# Altium PCB 8500_ADC_pcb.PcbDoc
Units mil, origin at the board's own origin, x right, y up, seen from the top; angles counter-clockwise.
Board outline 2040 x 2040 mil, 4 copper layers (Top Layer, Conexiones, Tierra, Bottom Layer); 92 components, 110 nets, 471 pads, 145 vias.
Unrouted connection lines stored in the file: 1.
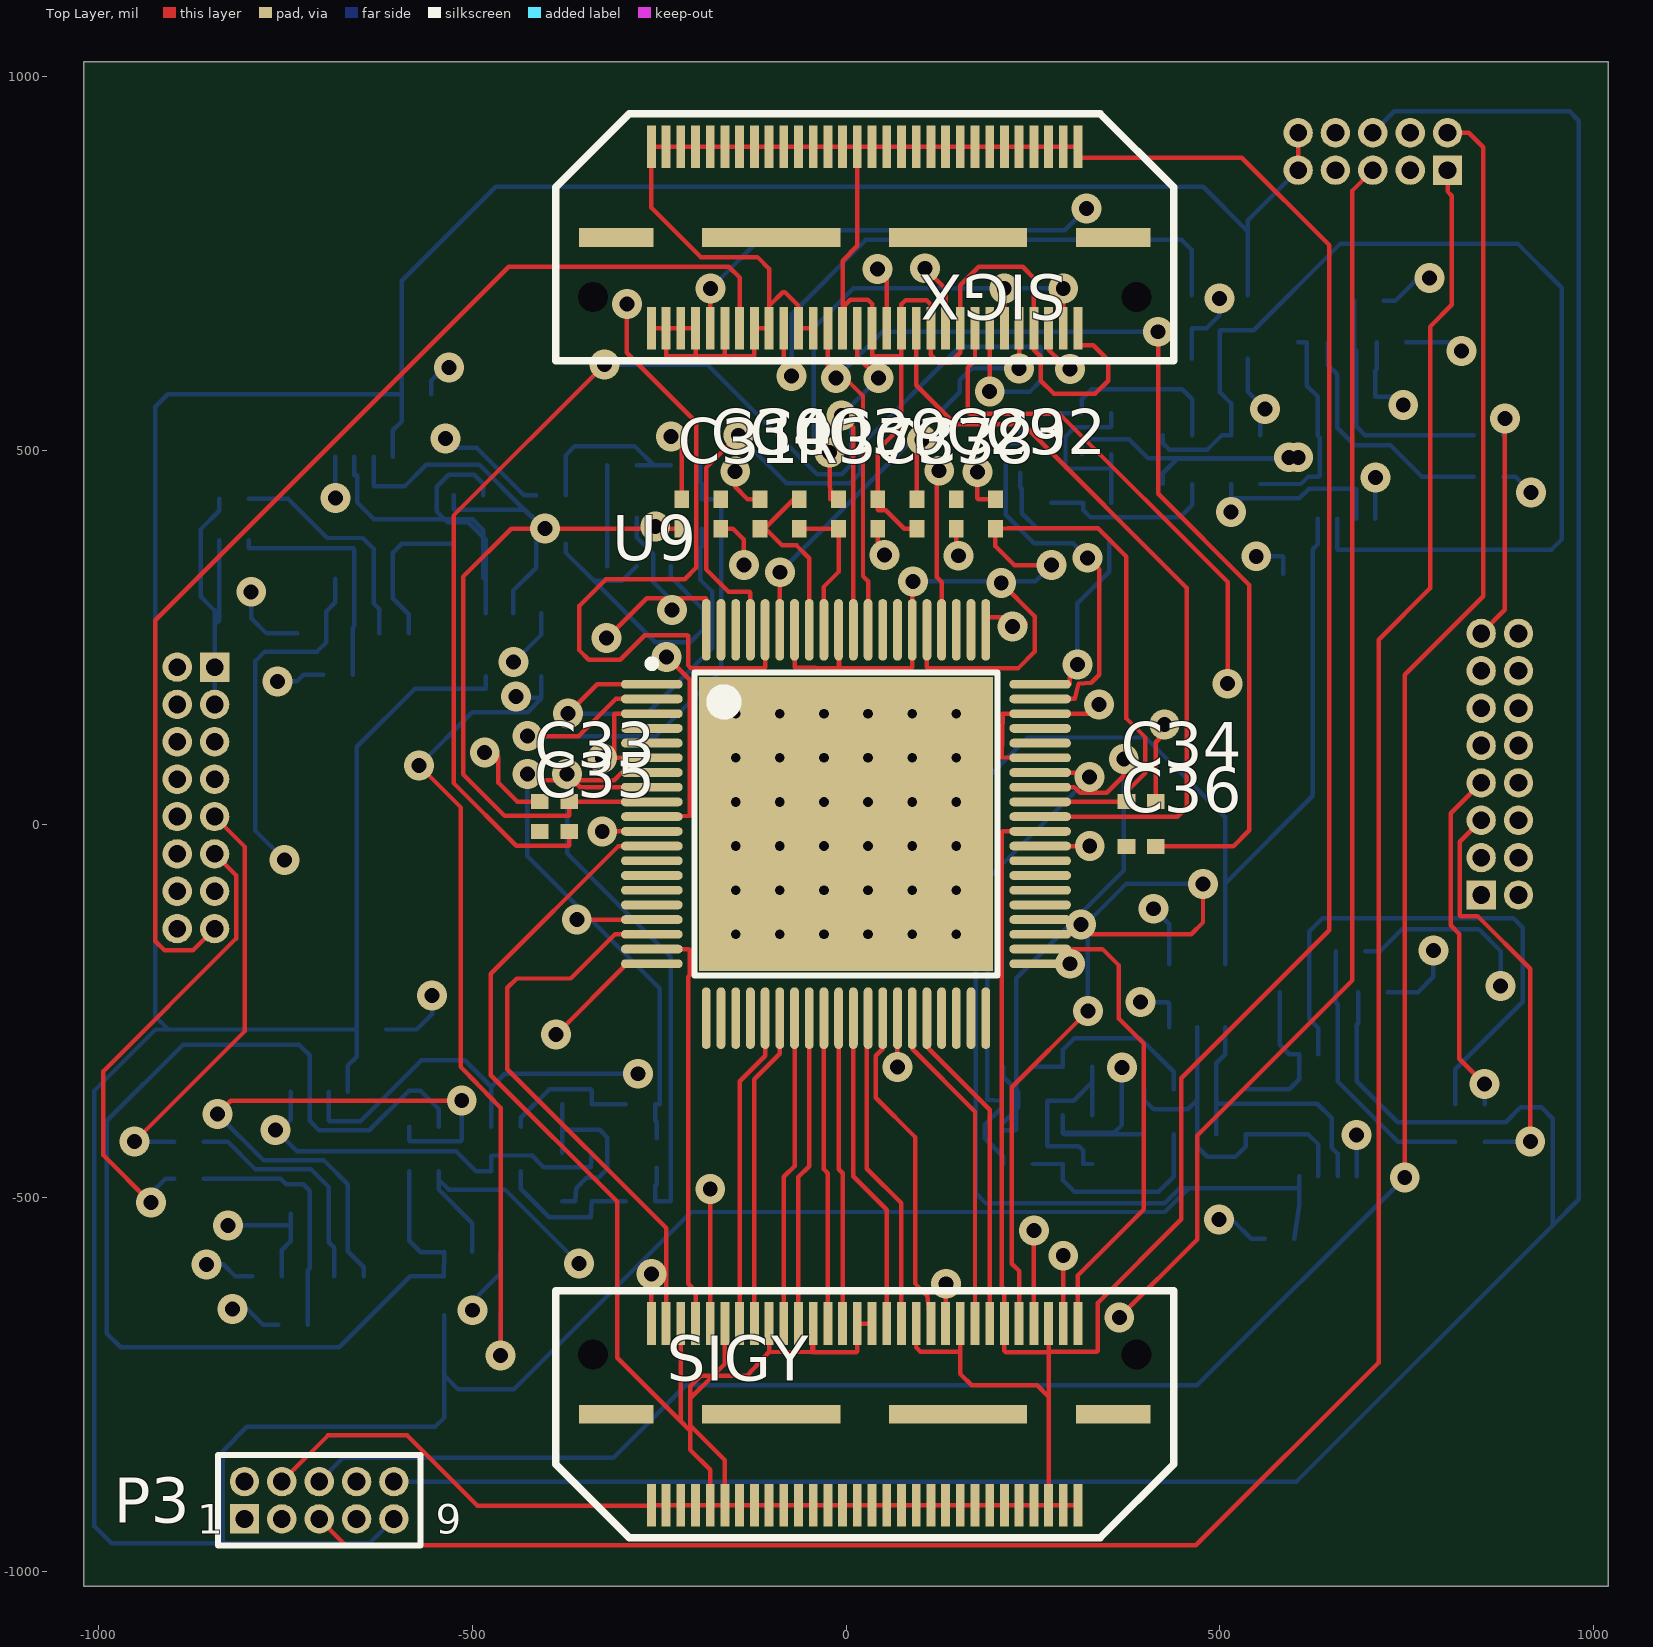
[diagram p0: Top Layer view]
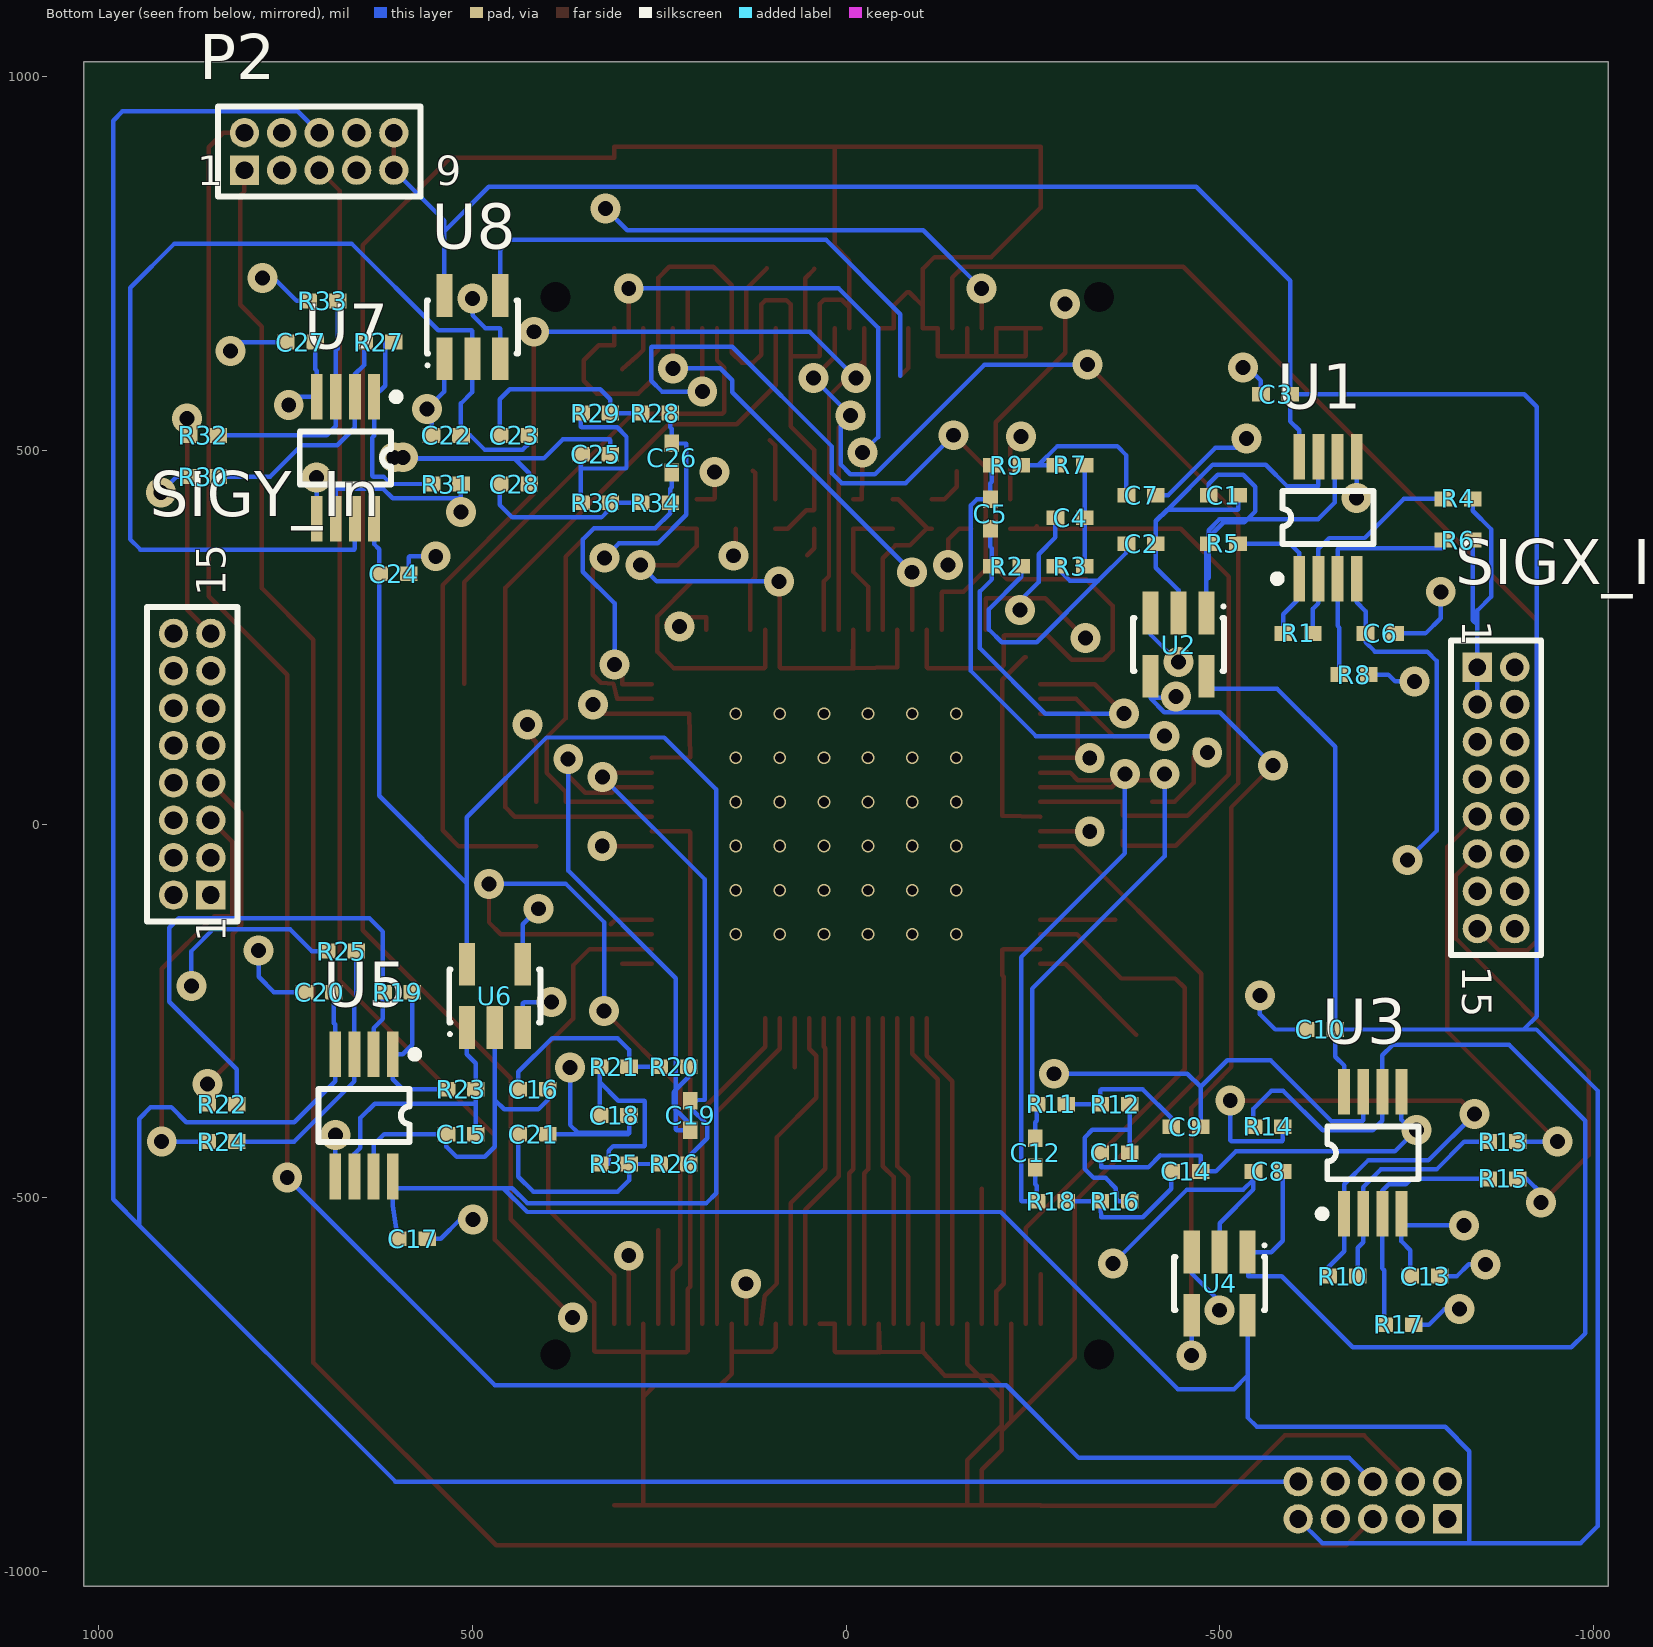
[diagram p1: Bottom Layer view, seen from below]
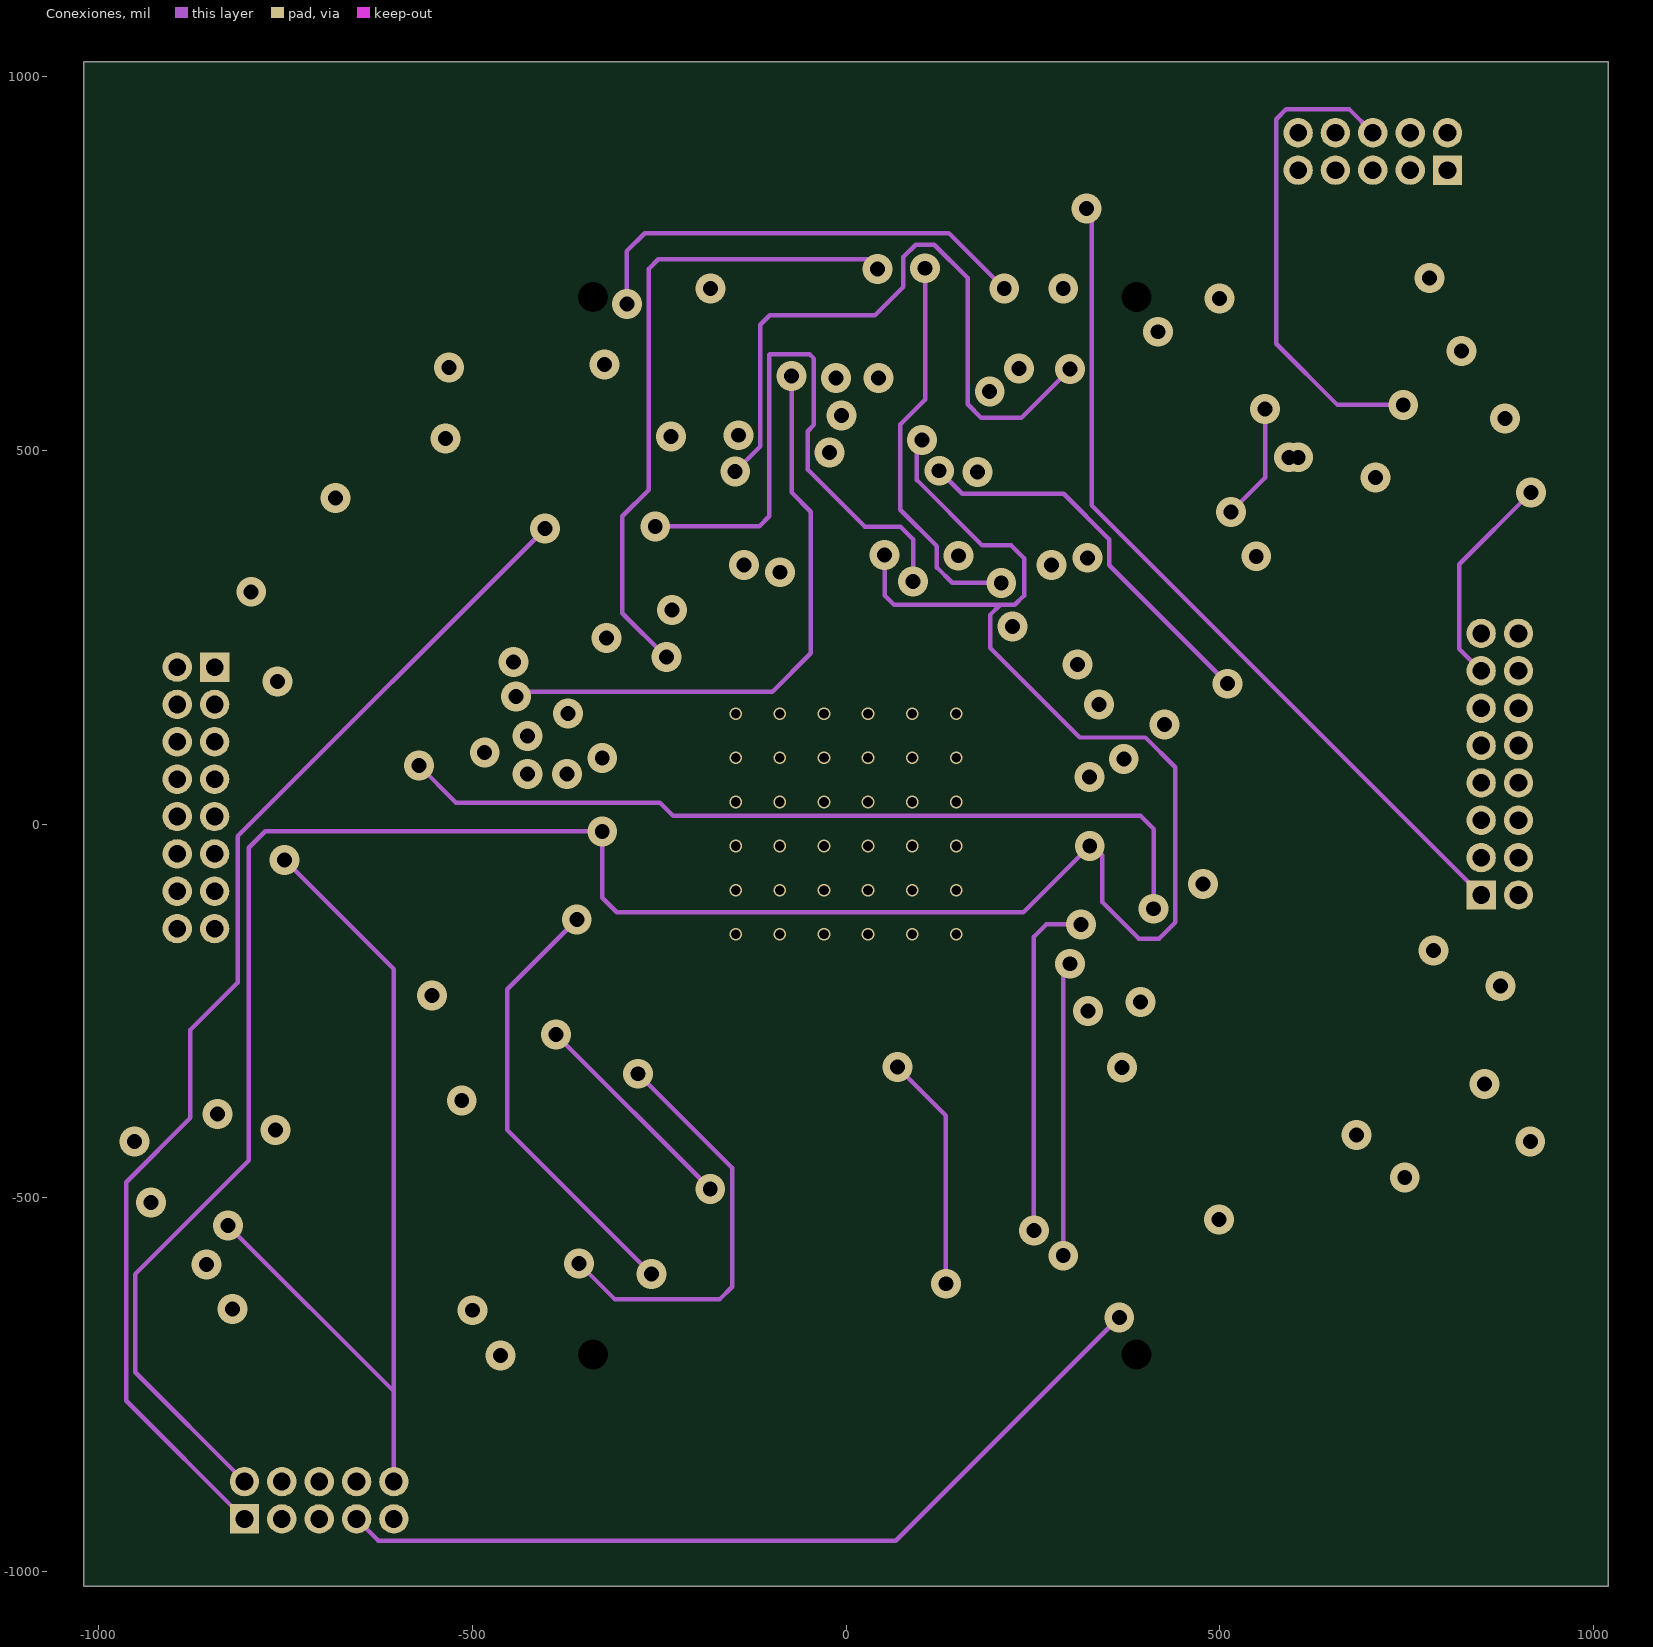
[diagram p2: Conexiones]
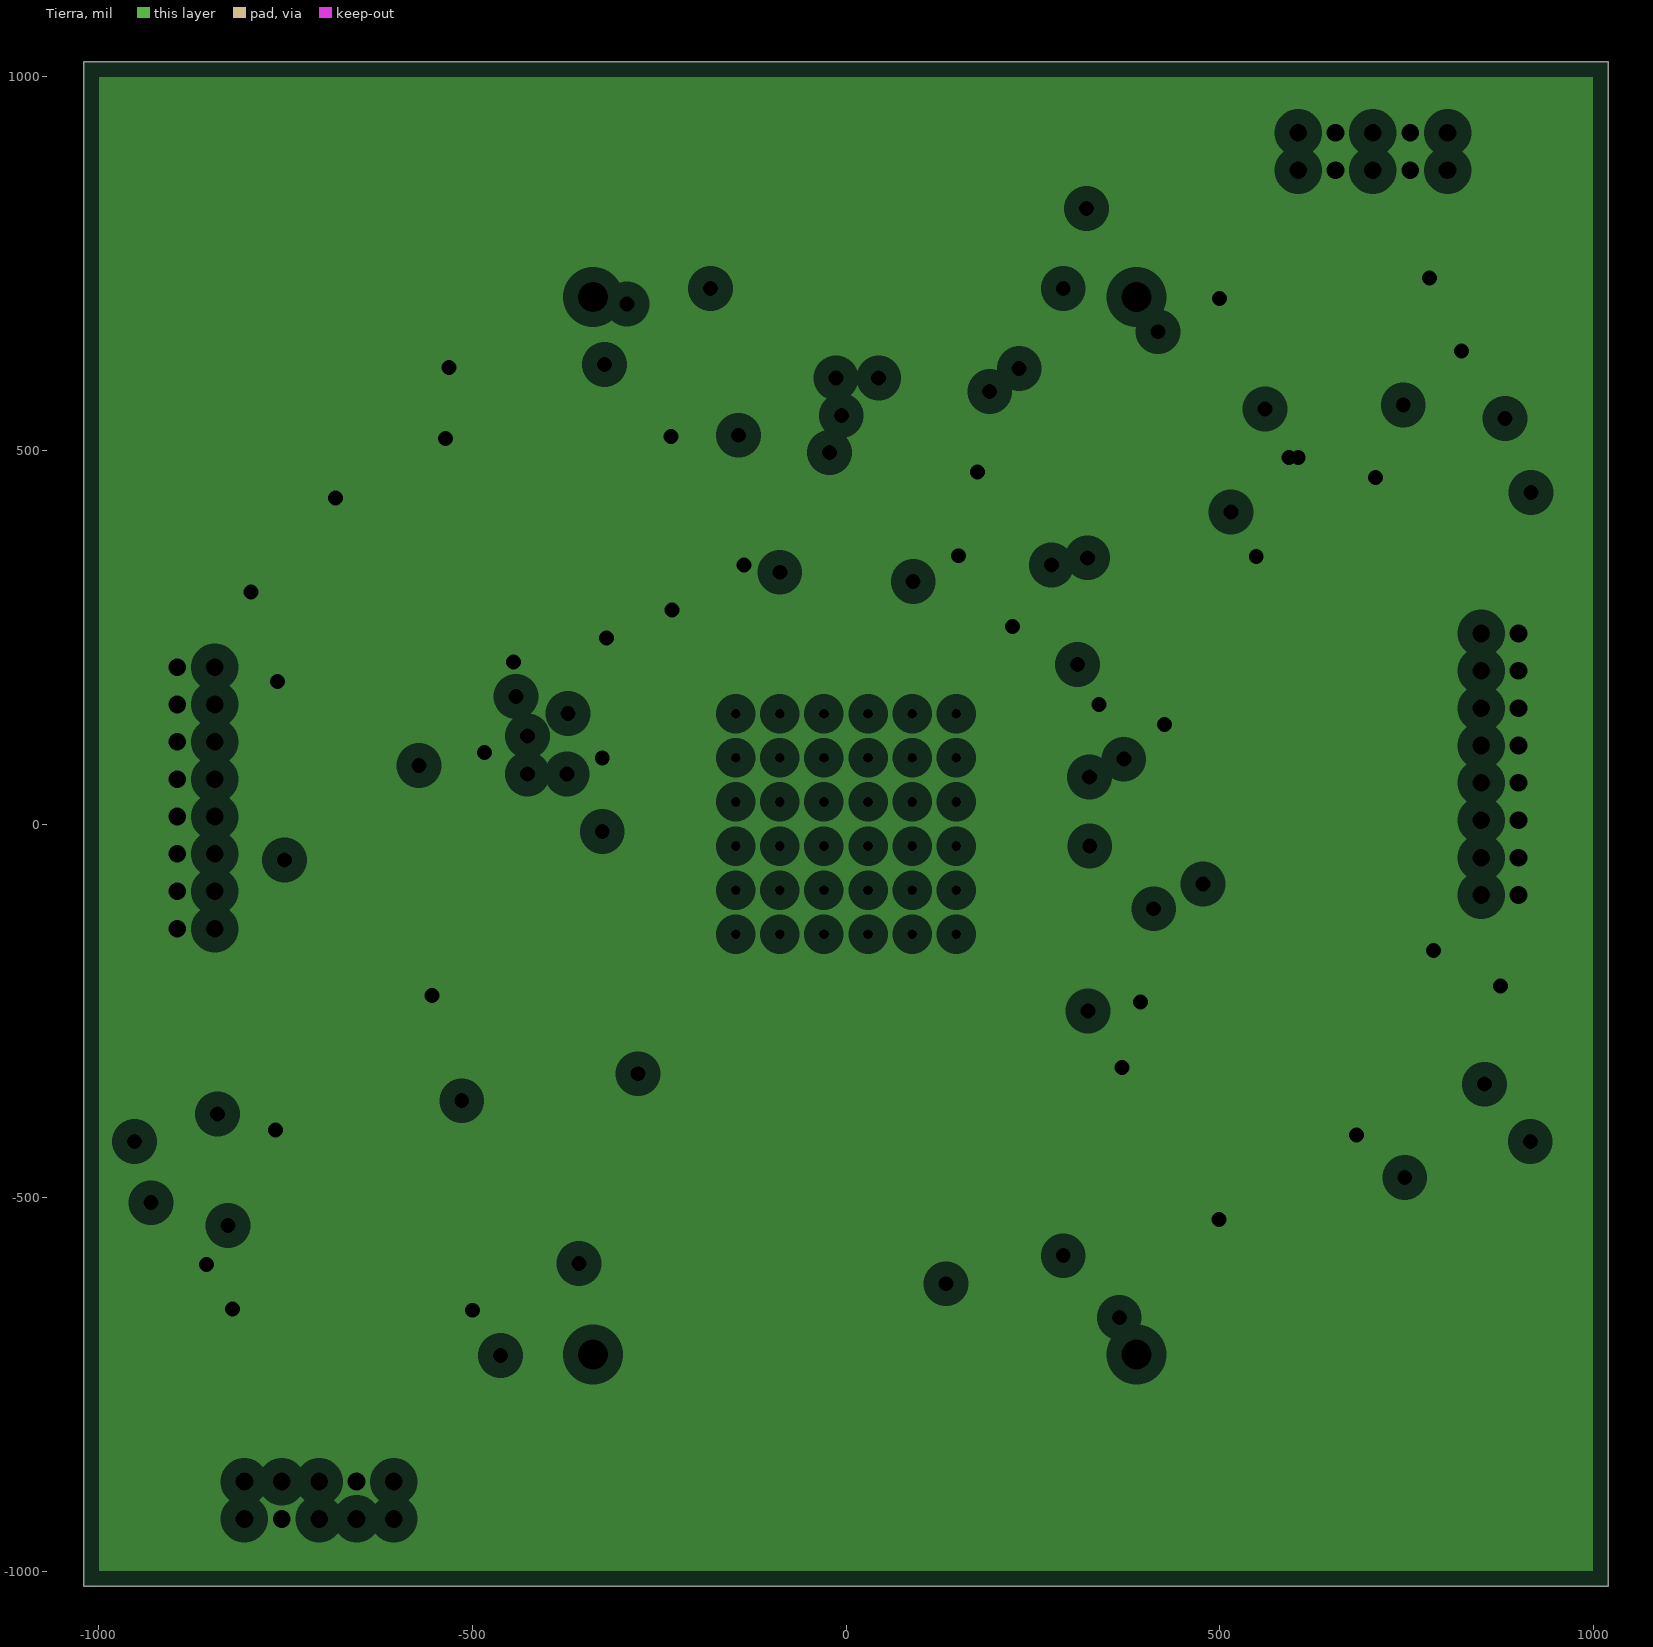
[diagram p3: Tierra, clearances drawn from the general rule]

## Layer stack, top to bottom
Top Layer: signal copper 1.4
Dielectric: core 12.6, FR-4, Dk 4.8
Conexiones: signal copper 1.4
Dielectric: prepreg 12.6, FR-4, Dk 4.8
Tierra: plane copper 1.4, net GND
Dielectric: core 12.6, FR-4, Dk 4.8
Bottom Layer: signal copper 1.4

## Board outline
-1020,-1020 1020,-1020 1020,1020 -1020,1020

## Design rules (kind name [scope] priority, off if disabled: settings)
Clearance [All] p1: gap=6
DiffPairsRouting [All] p1: maxlimit=6 minlimit=6 mostfreqgap=6 maxuncoupledlength=50
PlaneClearance [All] p1: clearance=20
PlaneConnect [All] p1: planeconnectstyle=Relief reliefexpansion=20 reliefentries=4 reliefconductorwidth=10 reliefairgap=10
PolygonConnect [All] p1: connectstyle=Relief reliefconductorwidth=10 reliefentries=4 polygonreliefangle="90 Angle"
RoutingVias [All] p1: holewidth=20 width=40 viastyle="Through Hole" minholewidth=20 minwidth=40 maxholewidth=20 maxwidth=40
SilkscreenOverComponentPads [All] p1: minsilkscreentomaskgap=10
SolderMaskExpansion SolderMaskExpansion_1 [IsVia] p1: expansion=1
SolderMaskExpansion [All] p2: expansion=3
Width [All] p1: maxlimit=10 minlimit=6 preferedwidth=6
24 further rules are at their usual default settings.

## Classes and differential pairs
component class 8500_ADC_X: C1 C2 C3 C4 C5 C6 C7 C8 C9 C10 C11 C12 C13 C14 P1 P3 R1 R2 R3 R4 R5 R6 R7 R8 R9 R10 R11 R12 R13 R14 R15 R16 R17 R18 SIGX_In SIGX_In1 U1 U2 U3 U4
component class 8500_ADC: C29 C30 C31 C32 C33 C34 C35 C36 C37 C38 C39 C40 R37 SIGX SIGX1 SIGY SIGY1 U9
component class 8500_ADC_Y: C15 C16 C17 C18 C19 C20 C21 C22 C23 C24 C25 C26 C27 C28 P2 R19 R20 R21 R22 R23 R24 R25 R26 R27 R28 R29 R30 R31 R32 R33 R34 R35 R36 SIGY_In SIGY_In1 U5 U6 U7 U8
differential pair CH2: +CH2_P -CH2_N
differential pair CH4: +CH4_P -CH4_N
differential pair CH5: +CH5_P -CH5_N
differential pair CH7: +CH7_P -CH7_N
differential pair XA: +XA_P -XA_N
differential pair XB: +XB_P -XB_N
differential pair YA: +YA_P -YA_N
differential pair YB: +YB_P -YB_N
differential pair ACLK: +ACLK_P -ACLK_N
differential pair CH2A: +CH2A_P -CH2A_N
differential pair CH2B: +CH2B_P -CH2B_N
differential pair CH4A: +CH4A_P -CH4A_N
differential pair CH4B: +CH4B_P -CH4B_N
differential pair CH5A: +CH5A_P -CH5A_N
differential pair CH5B: +CH5B_P -CH5B_N
differential pair CH7A: +CH7A_P -CH7A_N
differential pair CH7B: +CH7B_P -CH7B_N
differential pair ICLKI: +ICLKI_P -ICLKI_N
differential pair ICLK: +ICLK_P -ICLK_N
differential pair LCLK: +LCLK_P -LCLK_N

## Components (designator, comment, footprint, x,y, rotation, side; value= is the part's Value field where it differs from the comment)
C1 "Cap" 0402 -505,440 r180 bottom
C2 "Cap" 0402 -395,375 r0 bottom
C3 "Cap" 0402 -575,575 r0 bottom
C4 "Cap" 0402 -300,410 r180 bottom
C5 "Cap" 0402 -193.35,415 r270 bottom
C6 "Cap" 0402 -715,255 r0 bottom
C7 "Cap" 0402 -395,440 r0 bottom
C8 "Cap" 0402 -565,-465 r0 bottom
C9 "Cap" 0402 -455,-405 r0 bottom
C10 "Cap" 0402 -635,-275 r0 bottom
C11 "Cap" 0402 -360,-440 r180 bottom
C12 "Cap" 0402 -253.35,-440 r90 bottom
C13 "Cap" 0402 -775,-605 r0 bottom
C14 "Cap" 0402 -455,-465 r0 bottom
C15 "Cap" 0402 515,-415 r0 bottom
C16 "Cap" 0402 418.74,-355 r0 bottom
C17 "Cap" 0402 580,-555 r180 bottom
C18 "Cap" 0402 310,-390 r0 bottom
C19 "Cap" 0402 208.35,-390 r270 bottom
C20 "Cap" 0402 705,-225 r180 bottom
C21 "Cap" 0402 418.74,-415 r0 bottom
C22 "Cap" 0402 535,520 r180 bottom
C23 "Cap" 0402 443.74,520 r0 bottom
C24 "Cap" 0402 605,335 r180 bottom
C25 "Cap" 0402 335,495 r0 bottom
C26 "Cap" 0402 233.35,490 r90 bottom
C27 "Cap" 0402 730,645 r180 bottom
C28 "Cap" 0402 443.74,455 r0 bottom
C29 "Cap Semi" 0402 147.5,415 r90 top
C30 "Cap Semi" 0402 -167.5,415 r90 top
C31 "Cap Semi" 0402 -220,415 r270 top
C32 "Cap Semi" 0402 200,415 r90 top
C33 "Cap Semi" 0402 -390,30 r0 top
C34 "Cap Semi" 0402 395,30 r0 top
C35 "Cap Semi" 0402 -390,-10 r0 top
C36 "Cap Semi" 0402 395,-30 r0 top
C37 "Cap Semi" 0402 42.5,415 r270 top
C38 "Cap Semi" 0402 95,415 r270 top
C39 "Cap Semi" 0402 -10,415 r90 top
C40 "Cap Semi" 0402 -115,415 r90 top
P2 "FTS-105-02-F-D" MHDR2X5 805,875 r180 bottom locked
P3 "FTS-105-02-F-D" MHDR2X5 -805,-930 r0 top locked
R1 "Res3" 0402 -605,255 r180 bottom
R2 "Res3" 0402 -215,345 r180 bottom
R3 "Res3" 0402 -300,345 r180 bottom
R4 "Res3" 0402 -819.25,435 r180 bottom
R5 "Res3" 0402 -505,375 r180 bottom
R6 "Res3" 0402 -819.25,380 r180 bottom
R7 "Res3" 0402 -300,480 r0 bottom
R8 "Res3" 0402 -680,200 r180 bottom
R9 "Res3" 0402 -215,480 r180 bottom
R10 "Res3" 0402 -665,-605 r180 bottom
R11 "Res3" 0402 -275,-375 r180 bottom
R12 "Res3" 0402 -360,-375 r180 bottom
R13 "Res3" 0402 -879.25,-425 r180 bottom
R14 "Res3" 0402 -565,-405 r180 bottom
R15 "Res3" 0402 -879.25,-475 r180 bottom
R16 "Res3" 0402 -360,-505 r0 bottom
R17 "Res3" 0402 -740,-670 r180 bottom
R18 "Res3" 0402 -275,-505 r180 bottom
R19 "Res3" 0402 600,-225 r0 bottom
R20 "Res3" 0402 230,-325 r0 bottom
R21 "Res3" 0402 310,-325 r0 bottom
R22 "Res3" 0402 835,-375 r0 bottom
R23 "Res3" 0402 515,-355 r0 bottom
R24 "Res3" 0402 835,-425 r0 bottom
R25 "Res3" 0402 675,-170 r0 bottom
R26 "Res3" 0402 230,-455 r0 bottom
R27 "Res3" 0402 625,645 r0 bottom
R28 "Res3" 0402 255,550 r0 bottom
R29 "Res3" 0402 335,550 r0 bottom
R30 "Res3" 0402 860,465 r0 bottom
R31 "Res3" 0402 535,455 r0 bottom
R32 "Res3" 0402 860,520 r0 bottom
R33 "Res3" 0402 700,700 r0 bottom
R34 "Res3" 0402 255,430 r0 bottom
R35 "Res3" 0402 310,-455 r180 bottom
R36 "Res3" 0402 335,430 r180 bottom
R37 "Res3" 0402 -62.5,415 r90 top
SIGX "QTH-030-XX-F-D-A" QTH-030-XX-D-A 25,785 r180 top
SIGX_In "FTS-108-02-F-D" MHDR2X8 -845,210 r270 bottom locked
SIGY "QTH-030-XX-F-D-A" QTH-030-XX-D-A 25,-790 r0 top
SIGY_In "FTS-108-02-F-D" MHDR2X8 850,-95 r90 bottom locked
U1 "AD8056ARM" RM-8 -645,410 r180 bottom
U2 "SN74LVC1G66DBVR" SOT23-5 -445,240 r0 bottom
U3 "AD8056ARM" RM-8 -705,-440 r180 bottom
U4 "SN74LVC1G66DBVR" SOT23-5 -500,-615 r0 bottom
U5 "AD8056ARM" RM-8 645,-390 r0 bottom
U6 "SN74LVC1G66DBVR" SOT23-5 470,-230 r180 bottom
U7 "AD8056ARM" RM-8 670,490 r0 bottom
U8 "SN74LVC1G66DBVR" SOT23-5 500,665 r180 bottom
U9 "ADS5294" PFP80_M 0,0 r0 top

## Footprints (in the part's own frame and the unit in brackets; to place one, negate y for a bottom-side part, rotate by r counter-clockwise, add the part's x,y. Pads: shape width x height; smd on the part's side, far side on the other; paste and mask are expansions set on the pad)
0402 [mm] "Chip Capacitor, Body 1.0x0.5mm, IPC High Density"
  rect 0.6x0.5 smd: 1(-0.5,0) 2(0.5,0)
  body extent -0.55,-0.3 0.55,0.3, height 1.3
MHDR2X5 [mm] "Connector; Header; 5x2 Position"
  rect 1x1 hole 0.6: 1(0,0)
  round 1 hole 0.6: 2(0,1.27) 3(1.27,0) 4(1.27,1.27) 5(2.54,0) 6(2.54,1.27) 7(3.81,0) 8(3.81,1.27) 9(5.08,0) 10(5.08,1.27)
  silkscreen extent -0.9,-0.9 5.98,2.17
MHDR2X8 [mm] "Connector; Header; 8x2 Position"
  rect 1x1 hole 0.6: 1(0,0)
  round 1 hole 0.6: 2(0,1.27) 3(1.27,0) 4(1.27,1.27) 5(2.54,0) 6(2.54,1.27) 7(3.81,0) 8(3.81,1.27) 9(5.08,0) 10(5.08,1.27) 11(6.35,0) 12(6.35,1.27) 13(7.62,0) 14(7.62,1.27) 15(8.89,0) 16(8.89,1.27)
  silkscreen extent -0.9,-0.9 9.79,2.17
PFP80_M [mm] "80-Pin Plastic Quad Flat Pack PowerPAD, IPC Low Density"
  oval 2.1x0.3 smd: 1(-6.6,4.75) 2(-6.6,4.25) 3(-6.6,3.75) 4(-6.6,3.25) 5(-6.6,2.75) 6(-6.6,2.25) 7(-6.6,1.75) 8(-6.6,1.25) 9(-6.6,0.75) 10(-6.6,0.25) 11(-6.6,-0.25) 12(-6.6,-0.75) 13(-6.6,-1.25) 14(-6.6,-1.75) 15(-6.6,-2.25) 16(-6.6,-2.75) 17(-6.6,-3.25) 18(-6.6,-3.75) 19(-6.6,-4.25) 20(-6.6,-4.75) 41(6.6,-4.75) 42(6.6,-4.25) 43(6.6,-3.75) 44(6.6,-3.25) 45(6.6,-2.75) 46(6.6,-2.25) 47(6.6,-1.75) 48(6.6,-1.25) 49(6.6,-0.75) 50(6.6,-0.25) 51(6.6,0.25) 52(6.6,0.75) 53(6.6,1.25) 54(6.6,1.75) 55(6.6,2.25) 56(6.6,2.75) 57(6.6,3.25) 58(6.6,3.75) 59(6.6,4.25) 60(6.6,4.75)
  oval 0.3x2.1 smd: 21(-4.75,-6.6) 22(-4.25,-6.6) 23(-3.75,-6.6) 24(-3.25,-6.6) 25(-2.75,-6.6) 26(-2.25,-6.6) 27(-1.75,-6.6) 28(-1.25,-6.6) 29(-0.75,-6.6) 30(-0.25,-6.6) 31(0.25,-6.6) 32(0.75,-6.6) 33(1.25,-6.6) 34(1.75,-6.6) 35(2.25,-6.6) 36(2.75,-6.6) 37(3.25,-6.6) 38(3.75,-6.6) 39(4.25,-6.6) 40(4.75,-6.6) 61(4.75,6.6) 62(4.25,6.6) 63(3.75,6.6) 64(3.25,6.6) 65(2.75,6.6) 66(2.25,6.6) 67(1.75,6.6) 68(1.25,6.6) 69(0.75,6.6) 70(0.25,6.6) 71(-0.25,6.6) 72(-0.75,6.6) 73(-1.25,6.6) 74(-1.75,6.6) 75(-2.25,6.6) 76(-2.75,6.6) 77(-3.25,6.6) 78(-3.75,6.6) 79(-4.25,6.6) 80(-4.75,6.6)
  rect 10x10 smd: 81(0,0)
  silkscreen extent -6.72,-5.15 5.15,5.57, body extent -6,-6 6,6, height 1.2
QTH-030-XX-D-A [mm]
  rect 0.3x1.45 smd mask+0.05: 1(-7.25,3.085) 2(-7.25,-3.085) 3(-6.75,3.085) 4(-6.75,-3.085) 5(-6.25,3.085) 6(-6.25,-3.085) 7(-5.75,3.085) 8(-5.75,-3.085) 9(-5.25,3.085) 10(-5.25,-3.085) 11(-4.75,3.085) 12(-4.75,-3.085) 13(-4.25,3.085) 14(-4.25,-3.085) 15(-3.75,3.085) 16(-3.75,-3.085) 17(-3.25,3.085) 18(-3.25,-3.085) 19(-2.75,3.085) 20(-2.75,-3.085) 21(-2.25,3.085) 22(-2.25,-3.085) 23(-1.75,3.085) 24(-1.75,-3.085) 25(-1.25,3.085) 26(-1.25,-3.085) 27(-0.75,3.085) 28(-0.75,-3.085) 29(-0.25,3.085) 30(-0.25,-3.085) 31(0.25,3.085) 32(0.25,-3.085) 33(0.75,3.085) 34(0.75,-3.085) 35(1.25,3.085) 36(1.25,-3.085) 37(1.75,3.085) 38(1.75,-3.085) 39(2.25,3.085) 40(2.25,-3.085) 41(2.75,3.085) 42(2.75,-3.085) 43(3.25,3.085) 44(3.25,-3.085) 45(3.75,3.085) 46(3.75,-3.085) 47(4.25,3.085) 48(4.25,-3.085) 49(4.75,3.085) 50(4.75,-3.085) 51(5.25,3.085) 52(5.25,-3.085) 53(5.75,3.085) 54(5.75,-3.085) 55(6.25,3.085) 56(6.25,-3.085) 57(6.75,3.085) 58(6.75,-3.085) 59(7.25,3.085) 60(7.25,-3.085)
  rect 2.54x0.64 smd mask+0.05: 61(-8.445,0) 64(8.445,0)
  rect 4.7x0.64 smd mask+0.05: 62(-3.175,0) 63(3.175,0)
  round 0 hole 1.02 unplated: 65(-9.24,2.03) 66(9.24,2.03)
  silkscreen extent -10.5,-4.2 10.5,4.2
RM-8 [mm] "Shrink Small Outline, MSOP; 8 Leads; Body Width 3 mm; Pitch 0.65 mm"
  rect 0.4x1.55 smd: 1(-0.975,-2.075) 2(-0.325,-2.075) 3(0.325,-2.075) 4(0.975,-2.075) 5(0.975,2.075) 6(0.325,2.075) 7(-0.325,2.075) 8(-0.975,2.075)
  silkscreen extent -1.85,-2.2 1.55,0.9
SOT23-5 [mm] "SOT-23/SC-74A; 5 Leads; Body 3 x 3 mm, inc. leads (LxW max)"
  rect 0.55x1.45 smd: 1(-0.95,-1.075) 2(0,-1.075) 3(0.95,-1.075) 4(0.95,1.075) 5(-0.95,1.075)
  silkscreen extent -1.57,-1.35 1.55,0.9

## Part data
C1 C2 C3 C4 C5 C6 C7 C8 C9 C10 C11 C12 C13 C14 C15 C16 C17 C18 C19 C20 C21 C22 C23 C24 C25 C26 C27 C28: "Capacitor"
C29 C30 C31 C32 C33 C34 C35 C36 C37 C38 C39 C40: "Capacitor (Semiconductor SIM Model)"
P2 P3: library part FTR-105-01-D
R1 R2 R3 R4 R5 R6 R7 R8 R9 R10 R11 R12 R13 R14 R15 R16 R17 R18 R19 R20 R21 R22 R23 R24 R25 R26 R27 R28 R29 R30 R31 R32 R33 R34 R35 R36 R37: "Resistor"
SIGX_In SIGY_In: library part FTR-108-01-D
U1 U3 U5 U7: "Low Cost, 300MHz Voltage Feedback Amplifier"

## Via types
v1: diameter 40, hole 20, Top Layer to Bottom Layer, 87 vias
v2: diameter 16.93, hole 12.99, Top Layer to Bottom Layer, tented top, 36 vias
v3: diameter 40, hole 20, Top Layer to Conexiones, 22 vias

## Nets (pads, with @x,y where several pads share a name; then routed paths per layer and width w, separated by ;. In a path a pad name is that pad's centre, name@x,y a point inside that pad or via, vN(x,y) a via of type N, cw(c..) or ccw(c..) an arc to the next point about the centre after c; other vN are vias at no path point)
1.8_A: C31.2 C32.1 C33.2 C34.1 P3.1 U9.9 U9.52 U9.66 U9.71 U9.74 | length 4715.2
  Top Layer w6: U9.9 -315.78,29.53 -316.25,30 C33.2 -370.31,11.75 -371.31,10.75 -456.5,10.75 -512.5,66.75 -512.5,330.75 -447.93,395.31 v3(-402.69,395.31) -255.25,395.31 v3@-252.32,395.31 ; v3(-255.25,398.25) v3@-252.32,395.31 ; C31.2 v3@-252.32,395.31 ; U9.74 -68.9,209.75 -10.84,208.75 -8.84,208.75 ; v1(89.91,324.59) 88.58,323.26 U9.66 88.58,209.75 87.58,208.75 -8.84,208.75 ; U9.52 373.75,29.53 373.75,30 C34.1 375.32,43.25 400.75,68.68 400.75,115.75 375.32,141.18 375.32,357.68 337.25,395.75 216.18,395.75 C32.1 200,371.5 225,346.5 v1(275,346.5) ; -8.84,208.75 U9.71 -9.84,209.75 -8.84,208.75
  Conexiones w6: P3.1 -963.25,-771.75 -963.25,-479.25 -877.25,-393.25 -877.25,-275.25 -814.25,-212.25 -814.25,-16.25 v3(-402.69,395.31) ; v3(-255.25,398.25) -116.25,398.25 -102.75,411.75 -102.75,627.75 -101.75,628.75 -48.75,628.75 -42.84,622.84 -42.84,534.16 -51.25,525.75 -51.25,474.33 25.35,397.72 72.94,397.72 89.91,380.75 v1(89.91,324.59)
  Bottom Layer w6: v1(89.91,324.59) 253.09,324.59 v1(275,346.5)
1.8_D: C37.2 C38.1 P3.2 U9.11 U9.49 | length 3834
  Top Layer w6: v1(-326.18,-9.84) U9.11 ; C37.2 42.5,369 v3(51.75,359.75) ; C38.1 95,507 v3(101.75,513.75) ; U9.49 v1(326.18,-29.53)
  Conexiones w6: P3.2 -951.25,-733.75 -951.25,-602.25 -799.25,-450.25 -799.25,-31.75 -777.34,-9.84 v1(-326.18,-9.84) -326.18,-98.82 -306.75,-118.25 237.46,-118.25 v1(326.18,-29.53) 330.75,-29.53 343.25,-42.03 343.25,-104.75 391.75,-153.25 419.25,-153.25 440.75,-131.75 440.75,75.75 400.75,115.75 312.75,115.75 192.75,235.75 192.75,279.75 206.25,293.25 ; v3(51.75,359.75) 51.75,305.75 64.25,293.25 206.25,293.25 ; v3(101.75,513.75) 95,507 95,460.25 182.53,372.72 221.27,372.72 238.25,355.75 238.25,305.75 225.75,293.25 206.25,293.25
+3.3: P2.2 P3.6 | length 3099.4
  Top Layer w6: v1(747.75,-473.25) 747.75,199.75 852.75,304.75 852.75,905.75 833.5,925 P2.2
  Bottom Layer w6: P3.6 -673.25,-848.25 -311.25,-848.25 -214.25,-751.25 469.75,-751.25 v1(747.75,-473.25)
+3.3_1: P2.1 P3.5 | length 3172.4
  Top Layer w6: P3.5 -669.75,-965.25 468.25,-965.25 712.75,-720.75 712.75,246.75 781.75,315.75 781.75,665.75 810.75,694.75 810.75,840.75 805,846.5 P2.1
+3.3_2: P2.5 P3.7 | length 2832.5
  Top Layer w6: v1(365.75,-660.25) 469.75,-556.25 469.75,-417.25 677.75,-209.25 677.75,847.75 P2.5
  Conexiones w6: P3.7 -625.75,-959.25 66.75,-959.25 v1(365.75,-660.25)
+5: C3.1 C10.1 C17.1 C24.1 P2.9 P2.10 P3.9 U1.8 U2.5 U3.8 U4.5 U5.8 U6.5 U7.8 U8.5 | length 8854.9
  Top Layer w6: P2.9 P2.10
  Bottom Layer w6: U3.8 -666.61,-323.25 -654.68,-311.32 C10.1 ; U1.8 -606.61,526.75 -594.68,538.68 C3.1 ; P3.9 -637.25,-962.25 -834.25,-962.25 ; U4.5 -537.4,-738.1 ; U2.5 -482.4,180.75 -577.19,180.75 -654.68,103.25 C10.1 ; U6.5 507.4,-79.6 ; U8.5 537.4,793.25 ; C17.1 606.61,-510.32 U5.8@606.61,-487.25 ; P2.9 537.4,807.4 537.4,793.25 ; U5.8 U5.8@606.61,-487.25 ; U7.8 631.61,374.68 624.69,367.75 C24.1 624.69,37.69 507.4,-79.6 ; -906.75,-275 -924.25,-257.5 -924.25,558.25 -907.5,575 C3.1 ; -906.75,-275 C10.1 ; -906.75,-275 -924,-275 -1005.75,-356.75 -1005.75,-939.75 -983.25,-962.25 -834.25,-962.25 ; -834.25,-962.25 -834.25,-839.25 -801.75,-806.75 -549.9,-806.75 -537.4,-794.25 -537.4,-738.1 ; C3.1 -594.68,726.82 -468.75,852.75 477.9,852.75 537.4,793.25 ; -537.4,-738.1 -519.25,-756.25 -444.25,-756.25 -207.25,-519.25 426.75,-519.25 458.75,-487.25 ; 458.75,-487.25 446.75,-487.25 426.75,-507.25 186.75,-507.25 173.75,-494.25 173.75,46.25 243.25,115.75 400.75,115.75 507.4,9.09 507.4,-79.6 ; 458.75,-487.25 U5.8@606.61,-487.25
-5: C6.2 C13.2 C20.2 C27.2 P2.6 P3.10 U1.4 U3.4 U5.4 U7.4 | length 6666.4
  Conexiones w6: v1(-827.25,-537.25) -605,-759.5 ; v1(-751.25,-48.25) -605,-194.5 -605,-759.5 ; P3.10 -605,-759.5 ; P2.6 673.25,956.75 589.25,956.75 575.75,943.25 575.75,642.75 657.75,560.75 v1(745.75,560.75)
  Bottom Layer w6: v1(-827.25,-537.25) U3.4@-743.39,-537.25 ; C13.2 -755.31,-570.25 -743.39,-558.32 U3.4@-743.39,-537.25 ; v1(-751.25,-48.25) -790.25,-9.25 -790.25,218.25 -777.75,230.75 -707.81,230.75 -695.31,243.25 C6.2 -695.31,284.75 -683.39,296.68 U1.4 ; U3.4 U3.4@-743.39,-537.25 ; P3.10 603,-880 945.75,-537.25 ; C20.2 685.31,-266.32 683.39,-268.25 U5.4 683.39,-344.25 738.39,-399.25 882.75,-399.25 902.75,-379.25 930.75,-379.25 945.75,-394.25 945.75,-537.25 ; P2.6 733.75,953.75 968.25,953.75 980.75,941.25 980.75,-502.25 945.75,-537.25 ; C27.2 710.31,608.68 708.39,606.75 U7.4 734.8,571.69 v1(745.75,560.75)
ACLK_N: SIGY.27 U9.30 | length 410.9
  Top Layer w6: U9.30 -9.84,-461.94 -4.53,-467.25 SIGY.27
ACLK_P: SIGY.25 U9.29 | length 410.9
  Top Layer w6: U9.29 -29.53,-461.94 -24.21,-467.25 SIGY.25
CH2_N: C5.1 R9.1 U9.2 | length 779.5
  Top Layer w6: v1(-426.25,117.75) -357.83,117.75 -308.25,167.32 U9.2
  Bottom Layer w6: v1(-426.25,117.75) -254.25,117.75 -167.25,204.75 -167.25,426.69 -175.25,434.69 C5.1 -193.35,455.75 -195.31,457.72 R9.1
CH2_P: C5.2 R2.1 U9.1 | length 525.4
  Top Layer w6: v1(-372.25,147.75) -332.99,187.01 U9.1
  Bottom Layer w6: v1(-372.25,147.75) -266.75,147.75 -179.25,235.25 -179.25,311.19 -195.31,327.25 R2.1 -195.31,368.75 -193.35,370.72 C5.2
CH2A_N: SIGY.3 U9.18 | length 760.4
  Top Layer w6: U9.18 -309.07,-147.64 -368.18,-206.75 -440.75,-206.75 -453.25,-219.25 -453.25,-328.25 -240.75,-540.76 SIGY.3
CH2A_P: SIGY.1 U9.17 | length 759.4
  Top Layer w6: v3(-360.25,-127.95) U9.17 ; SIGY.1 v3(-260.43,-602.25)
  Conexiones w6: v3(-360.25,-127.95) -453.25,-220.95 -453.25,-409.43 v3(-260.43,-602.25)
CH2B_N: SIGY.9 U9.20 | length 639.8
  Top Layer w6: v3(-388.12,-281.88) -293.25,-187.01 U9.20 ; SIGY.9 v3(-181.69,-488.31)
  Conexiones w6: v3(-388.12,-281.88) v3(-181.69,-488.31)
CH2B_P: SIGY.7 U9.19 | length 556.1
  Top Layer w6: U9.19 -210.25,-167.32 -209.25,-168.32 -209.25,-202.25 -211.25,-204.25 -211.25,-615.25 -201.38,-625.13 SIGY.7
CH4_N: C12.1 R18.1 U9.8 | length 816.6
  Top Layer w6: v1(-373.25,66.75) -355.72,49.21 U9.8
  Bottom Layer w6: v1(-373.25,66.75) -373.25,-39.25 -234.25,-178.25 -234.25,-504 -235.25,-505 R18.1 -255.31,-484.25 -253.35,-482.28 C12.1
CH4_P: C12.2 R11.1 U9.7 | length 741.2
  Top Layer w6: v1(-426.25,66.75) -418.25,58.75 -310.25,58.75 -300.1,68.9 U9.7
  Bottom Layer w6: v1(-426.25,66.75) -426.25,-43.25 -249.25,-220.25 -249.25,-375 R11.1 -255.31,-397.28 -253.35,-399.25 C12.2
CH4A_N: SIGY.15 U9.26 | length 422.8
  Top Layer w6: SIGY.15 -122.64,-341.64 -88.58,-307.58 U9.26
CH4A_P: SIGY.13 U9.25 | length 422.8
  Top Layer w6: SIGY.13 -142.32,-344.31 -108.27,-310.25 U9.25
CH4B_N: SIGY.21 U9.28 | length 414.7
  Top Layer w6: SIGY.21 -63.58,-472.25 -49.21,-457.88 U9.28
CH4B_P: SIGY.19 U9.27 | length 414.7
  Top Layer w6: SIGY.19 -83.27,-472.25 -68.9,-457.88 U9.27
CH5_N: C19.1 R26.1 U9.54 | length 681.1
  Top Layer w6: U9.54 319.6,68.9 v1(325.75,62.75)
  Bottom Layer w6: R26.1 210.32,-445.25 185.75,-420.68 185.75,-402.25 208.35,-379.65 C19.1 188.75,-369.31 188.75,-74.25 v1(325.75,62.75)
CH5_P: C19.2 R20.1 U9.53 | length 823.8
  Top Layer w6: U9.53 305.75,49.21 313.21,41.75 348.75,41.75 371.75,64.75 v1(371.75,86.75)
  Bottom Layer w6: R20.1 210.32,-338.25 227.75,-355.68 ; v1(371.75,86.75) 371.75,-62.25 227.75,-206.25 227.75,-355.68 ; 227.75,-382.25 227.75,-355.68 ; 227.75,-382.25 227.75,-408.68 226.75,-409.68 C19.2 208.35,-401.65 227.75,-382.25 ; 227.75,-382.25 230.75,-379.25 230.75,-358.68 227.75,-355.68
CH5A_N: SIGY.47 U9.36 | length 443.5
  Top Layer w6: U9.36 108.27,-298.18 192.32,-382.24 SIGY.47
CH5A_P: SIGY.45 U9.35 | length 443.5
  Top Layer w6: U9.35 88.58,-300.94 172.64,-384.99 SIGY.45
CH5B_N: SIGY.41 U9.34 | length 435.8
  Top Layer w6: v3(68.9,-325.4) U9.34 ; SIGY.41 133.27,-615.73 v1(133.75,-615.25)
  Conexiones w6: v3(68.9,-325.4) 133.75,-390.25 v1(133.75,-615.25)
CH5B_P: SIGY.39 U9.33 | length 441.5
  Top Layer w6: U9.33 49.21,-300.79 39.75,-310.25 39.75,-366.25 92.44,-418.95 92.44,-614.89 108.8,-631.25 SIGY.39
CH7_N: C26.1 R34.1 U9.60 | length 441.8
  Top Layer w6: U9.60 299.22,187.01 299.22,203.11 v1(309.75,213.64)
  Bottom Layer w6: C26.1 233.35,450.72 235.32,448.75 R34.1 235.32,415.99 255.56,395.75 337.25,395.75 352.25,380.75 352.25,337.75 309.75,295.25 v1(309.75,213.64)
CH7_P: C26.2 R28.1 U9.59 | length 551.4
  Top Layer w6: U9.59 306.32,167.32 311.22,187.75 328.14,189.14 338.75,199.75 338.75,340.75 v1(323.25,356.25)
  Bottom Layer w6: R28.1 235.32,530.72 233.35,528.75 C26.2 213.75,508.69 213.75,413.75 252,375.5 304,375.5 v1(323.25,356.25)
CH7A_N: SIGY.53 U9.44 | length 645.3
  Top Layer w6: SIGY.53 v3(251.38,-543.75) ; U9.44 308.45,-127.95 v3(314.75,-134.25)
  Conexiones w6: v3(251.38,-543.75) 251.38,-151.12 268.25,-134.25 v3(314.75,-134.25)
CH7A_P: SIGY.51 U9.43 | length 1034.8
  Top Layer w6: SIGY.51 231.69,-598.25 221.75,-588.31 221.75,-352.25 v1(323.75,-250.25) ; U9.43 461.86,-147.64 477.75,-131.75 v1(477.75,-80.25)
  Bottom Layer w6: v1(323.75,-250.25) 323.75,-131.25 374.75,-80.25 v1(477.75,-80.25)
CH7B_N: SIGY.59 U9.42 | length 644.2
  Top Layer w6: U9.42 343.25,-167.32 365.25,-189.32 365.25,-260.75 398.75,-294.25 398.75,-515.51 310.43,-603.82 SIGY.59
CH7B_P: SIGY.57 U9.41 | length 525.2
  Top Layer w6: U9.41 v3(299.75,-187.01) ; SIGY.57 v1(290.75,-577.75)
  Conexiones w6: v1(290.75,-577.75) 290.75,-196.01 v3(299.75,-187.01)
D_GND: C37.1 C38.2 P3.4 SIGX.1 SIGX.2 SIGX.4 SIGX.6 SIGX.7 SIGX.8 SIGX.10 SIGX.12 SIGX.14 SIGX.16 SIGX.17 SIGX.18 SIGX.20 SIGX.21 SIGX.22 SIGX.24 SIGX.25 SIGX.26 SIGX.28 SIGX.29 SIGX.30 SIGX.32 SIGX.33 SIGX.34 SIGX.36 SIGX.37 SIGX.38 SIGX.39 SIGX.40 SIGX.42 SIGX.43 SIGX.44 SIGX.45 SIGX.46 SIGX.48 SIGX.49 SIGX.50 SIGX.52 SIGX.53 SIGX.54 SIGX.55 SIGX.56 SIGX.57 SIGX.58 SIGX.59 SIGX.60 SIGY.2 SIGY.4 SIGY.5 SIGY.6 SIGY.8 SIGY.10 SIGY.11 SIGY.12 SIGY.14 SIGY.16 SIGY.17 SIGY.18 SIGY.20 SIGY.22 SIGY.23 SIGY.24 SIGY.26 SIGY.28 SIGY.29 SIGY.30 SIGY.31 SIGY.32 SIGY.34 SIGY.36 SIGY.37 SIGY.38 SIGY.40 SIGY.42 SIGY.43 SIGY.44 SIGY.46 SIGY.48 SIGY.49 SIGY.50 SIGY.52 SIGY.54 SIGY.55 SIGY.56 SIGY.58 SIGY.60 U9.12 U9.50 | length 9358.8
  Top Layer w6: P3.4 -693.25,-818.25 -587.25,-818.25 -493.25,-912.25 -260.43,-912.25 SIGY.2 SIGY.4 SIGY.6 SIGY.8 SIGY.10 ; SIGX.59 SIGX.57 ; U9.12 -304.53,-29.53 -475.25,-200.25 -475.25,-336.25 -306.25,-505.25 -306.25,-714.25 -221.06,-799.44 ; SIGY.5 -221.06,-799.44 ; SIGY.11 -162.01,-722.25 -178.01,-738.25 ; SIGX.49 -162.01,626.75 -163.01,625.75 ; SIGY.17 -102.95,-706.25 ; SIGX.37 SIGX.39 -63.58,693.58 -81.75,711.75 -84.45,711.75 -102.95,693.25 ; SIGX.33 SIGX.33@-4.53,691.47 ; SIGY.31 SIGY.29 15.16,-705.34 13.75,-706.75 -42.4,-706.75 -43.9,-705.25 SIGY.23 -44.9,-707.25 -102.95,-706.25 ; SIGY.37 93.9,-700.47 99.68,-706.25 151.95,-706.25 152.95,-705.25 ; C38.2 77.75,395.31 53.31,419.75 43.5,419.75 42.5,420.75 C37.1 42.5,500.5 74.21,532.21 74.21,626.75 ; SIGY.43 152.95,-705.25 ; U9.50 209.75,-9.84 208.75,-10.84 208.75,-619.25 212.01,-622.51 SIGY.49 212.01,-705.25 213.51,-706.75 269.75,-706.75 271.06,-705.44 ; SIGY.55 271.06,-705.25 ; SIGY.60 SIGY.58 SIGY.56 ; SIGX.1 310.43,640.75 330.75,640.75 350.75,620.75 350.75,593.25 333.25,575.75 278.25,575.75 260.75,593.25 260.75,625.38 251.38,634.75 SIGX.7 251.38,730.75 236.38,745.75 177.75,745.75 152.95,720.95 SIGX.17 152.95,630.75 139.71,617.5 123.99,617.5 113.58,627.91 SIGX.21 113.58,695.25 107.75,701.09 79.75,701.09 74.21,695.55 SIGX.25 74.21,626.75 ; SIGX.57 -240.75,626.75 -239.75,625.75 -200.38,625.75 ; SIGX.57 SIGX.55 SIGX.53 -201.38,626.75 -200.38,625.75 ; -221.06,-799.44 -208.25,-812.25 ; -208.25,-812.25 -208.25,-805.01 ; -208.25,-812.25 -208.25,-837.69 -181.69,-864.25 SIGY.10 ; -208.25,-805.01 -208.25,-768.5 ; -208.25,-805.01 -162.01,-851.25 SIGY.12 ; -208.25,-768.5 -178.01,-738.25 ; -208.25,-768.5 -208.25,-752.25 -194.25,-738.25 -178.01,-738.25 ; -200.38,625.75 -163.01,625.75 ; SIGY.10 SIGY.12 ; -178.01,-738.25 -131.95,-738.25 -102.95,-706.25 ; -163.01,625.75 -123.64,625.75 -122.64,626.75 SIGX.45 SIGX.43 -102.95,693.25 ; SIGY.12 SIGY.14 SIGY.16 SIGY.18 SIGY.20 SIGY.22 SIGY.24 SIGY.26 SIGY.28 SIGY.30 SIGY.32 SIGY.34 SIGY.36 SIGY.38 SIGY.40 SIGY.42 SIGY.44 SIGY.46 SIGY.48 SIGY.50 SIGY.52 SIGY.54 SIGY.56 ; -102.95,693.25 -102.95,743.25 -118.45,758.75 -194.25,758.75 -260.43,824.93 SIGX.60 SIGX.58 SIGX.56 SIGX.54 SIGX.52 SIGX.50 SIGX.48 SIGX.46 SIGX.44 SIGX.42 SIGX.40 SIGX.38 SIGX.36 SIGX.34 SIGX.32 ; SIGX.33@-4.53,691.47 5.75,701.75 29.4,701.75 34.84,696.31 SIGX.29 34.84,626.75 35.84,625.75 73.21,625.75 74.21,626.75 ; SIGX.33@-4.53,691.47 -4.53,753.97 15.16,773.66 SIGX.32 ; SIGX.32 SIGX.30 SIGX.28 SIGX.26 SIGX.24 SIGX.22 SIGX.20 SIGX.18 SIGX.16 SIGX.14 SIGX.12 SIGX.10 SIGX.8 SIGX.6 SIGX.4 SIGX.2 310.43,891.75 529.75,891.75 646.75,774.75 646.75,-142.25 448.75,-340.25 448.75,-528.91 336.75,-640.91 336.75,-705.25 335.75,-706.25 272.06,-706.25 271.06,-705.25 ; 152.95,-705.25 152.95,-735.96 168.25,-751.25 255.75,-751.25 271.06,-766.57 ; SIGY.56 271.06,-766.57 ; 271.06,-766.57 271.06,-705.44 ; 271.06,-705.44 271.06,-705.25
GND: C3.2 C4.1 C6.1 C7.1 C10.2 C11.1 C13.1 C14.1 C17.2 C18.1 C20.1 C21.1 C24.2 C25.1 C27.1 C28.1 C29.1 C30.1 C31.1 C32.2 C33.1 C34.2 P2.3 P2.4 P2.7 P2.8 P3.3 P3.8 R8.2 R17.2 R25.2 R33.2 SIGX_In.2 SIGX_In.4 SIGX_In.6 SIGX_In.8 SIGX_In.10 SIGX_In.12 SIGX_In.14 SIGX_In.16 SIGY_In.2 SIGY_In.4 SIGY_In.6 SIGY_In.8 SIGY_In.10 SIGY_In.12 SIGY_In.14 SIGY_In.16 U1.5 U2.3 U3.5 U4.3 U5.5 U6.3 U7.5 U8.3 U9.3 U9.6 U9.55 U9.58 U9.61 U9.80 | length 4509.6
  Top Layer w6: v1(-483.5,95.75) -471,95.75 -465.08,89.84 -465.08,55.33 -439.75,30 C33.1 ; v1(-326.18,88.58) v1@-309.25,88.58 ; v1(-320.25,248.75) -266.75,302.25 -187.51,302.25 -187.01,301.75 U9.80 ; U9.6 v1@-309.25,88.58 ; U9.3 -309.25,147.64 -310.25,146.64 -310.25,89.58 v1@-309.25,88.58 ; v1(-234.25,518.5) -220,504.24 C31.1 ; C30.1 -151.32,395.31 -136.75,380.75 v1(-136.75,346.5) ; C29.1 147.5,362.25 v1(150.75,359) ; v1(175.75,471) 175.75,435.68 176.75,434.68 C32.2 ; U9.61 187.01,276.75 232.75,276.75 240.75,268.75 240.75,266.75 226.75,252.75 224.75,252.75 222.75,254.75 v1(222.75,264.25) ; U9.55 208.75,89.58 209.75,147.64 U9.58 326.18,147.64 v1(338.68,160.14) ; C34.2 414.69,109.44 426,120.75 v1(426,133.25)
  Bottom Layer w6: v1(-856,-589.25) -833.36,-589.25 -817.61,-605 C13.1 ; v1(-821,-649.25) -800.86,-649.25 -780.12,-670 R17.2 ; v1(-796,310.75) -796,275.51 -775.49,255 C6.1 ; v1(-763.75,-409.25) v1(-763.5,-409.25) ; v1(-761,190.75) -735.12,190.75 -725.86,200 R8.2 ; U3.5 -743.39,-395.89 -756.75,-409.25 v1(-763.5,-409.25) ; v1(-683.39,436.18) U1.5 ; C10.2 -574.51,-275 -554,-254.49 v1(-554,-229.25) ; C3.2 -555.31,593.25 -537.81,610.75 v1(-531.5,610.75) ; v1(-536,515.75) -536,504.75 -534.5,503.25 -494.25,503.25 -431,440 C7.1 ; v1(-500,-650.72) -500,-638.92 -462.6,-601.51 U4.3 ; v1(-445,216.78) -445,216.08 -407.6,253.49 U2.3 ; C11.1 -341.31,-459.25 -404.75,-459.25 -420.75,-443.25 -474.69,-444.25 C14.1 -494.98,-465 -521.73,-438.25 -734.5,-438.25 v1(-763.5,-409.25) ; C4.1 -280.31,383.75 -257.75,361.19 -257.75,323.75 -220.25,286.25 v1(-232.75,286.25) ; C18.1 290.32,-412.75 ; C25.1 315.32,513.75 316.32,514.75 378.75,514.75 404.34,489.16 v1@590.16,489.16 ; v1(369.25,-325.75) 369.25,-402.75 358.75,-413.25 290.82,-413.25 290.32,-412.75 ; v1(394.25,-238.25) 430.75,-238.25 432.6,-240.1 U6.3 ; C21.1 291.75,-415 290.32,-413.57 290.32,-412.75 ; C28.1 424.05,469.55 443.25,488.75 589.75,488.75 v1@590.16,489.16 ; U8.3 462.6,662.75 463.6,663.75 482.75,663.75 499.75,680.75 v1(499.75,703.25) ; v1(499,-529.25) 516.64,-529.25 542.38,-555 C17.2 ; v1(549,358.25) 583.81,358.25 585.31,356.75 C24.2 ; v1(605.25,490.75) v1(592.75,490.75) ; U5.5 v1(683.39,-416.18) ; R25.2 714.98,-170 743.98,-141 847,-141 876,-170 v1(876,-216.75) ; U7.5 v1(708.39,463.82) ; R33.2 735.12,700 765.87,730.75 v1(781,730.75) ; C20.1 765.49,-225 786,-204.49 v1(786,-169.25) ; C27.1 811.75,645 v1(823.5,633.25) ; v1@590.16,489.16 590.75,489.75 590.75,490.25 591.25,490.75 v1(592.75,490.75) ; v1@590.16,489.16 591.16,489.16 v1(592.75,490.75)
ICLK_N: C40.1 R37.2 U9.73 | length 241.1
  Top Layer w6: C40.1 C40.1@-109.25,395.31 ; R37.2 -69.88,434.68 C40.1@-109.25,395.31 ; U9.73 -49.21,355.75 -66.21,372.75 -85.19,372.75 -107.75,395.31 C40.1@-109.25,395.31
ICLK_P: C39.1 R37.1 U9.72 | length 196.1
  Top Layer w6: R37.1 C39.1 -10,337.28 -29.53,317.75 U9.72
ICLKI_N: C40.2 SIGX.5 | length 1042.8
  Top Layer w6: v3(-148.25,471.75) -148.25,451.18 -131.75,434.68 C40.2 ; SIGX.5 271.06,634.75 280.06,625.75 v3(299.75,608.75)
  Conexiones w6: v3(-148.25,471.75) -114.75,505.25 -114.75,668.25 -102.25,680.75 38.75,680.75 76.75,718.75 76.75,758.87 93.25,775.37 118.13,775.37 162.75,730.75 162.75,561.75 180.75,543.75 234.75,543.75 v3(299.75,608.75)
ICLKI_P: C39.2 SIGX.3 | length 657.8
  Top Layer w6: v1(-22.25,497.25) -21.25,434.68 C39.2 ; SIGX.3 v1(290.75,716.75)
  Bottom Layer w6: v1(-22.25,497.25) -42.84,517.84 -42.84,664.16 9.75,716.75 v1(290.75,716.75)
LCLK_N: SIGY.35 U9.32 | length 428.7
  Top Layer w6: U9.32 29.53,-298.18 27.75,-299.96 27.75,-461.25 74.21,-507.72 SIGY.35
LCLK_P: SIGY.33 U9.31 | length 427.2
  Top Layer w6: U9.31 9.84,-471.35 54.53,-516.03 SIGY.33
NetC1_1: C1.1 R5.1 U1.6 U2.1 | length 619.1
  Bottom Layer w6: U1.6 -657.8,466.75 -654.25,466.75 -654.25,430.25 -631.75,407.75 -537.25,407.75 ; C1.1 -485.31,455.5 -497.31,467.5 -531.75,467.5 -547.75,451.5 -547.75,418.25 -537.25,407.75 ; U2.1 -482.4,326.75 ; -537.25,407.75 -533.25,403.75 -505.4,403.75 R5.1@-485.31,383.66 ; -537.25,407.75 -499.81,407.75 -485.31,393.25 R5.1@-485.31,383.66 ; R5.1@-485.31,383.66 -482.4,380.75 -482.4,326.75 ; R5.1@-485.31,383.66 R5.1 -485.31,329.66 -482.4,326.75
NetC1_2: C1.2 C2.1 U1.7 U2.2 | length 571.5
  Bottom Layer w6: U1.7 -632.2,452.75 -631.2,451.75 -590.75,451.75 -561.75,480.75 -490.57,480.75 -430.57,420.75 ; C1.2 -524.69,421.25 -524.19,420.75 -430.57,420.75 ; U2.2 -445,312.75 -414.68,343.06 C2.1 -414.68,404.86 ; -430.57,420.75 -414.68,404.86 ; -430.57,420.75 -429.68,420.75 -414.68,405.75 -414.68,404.86
NetC2_2: C2.2 R2.2 R3.1 | length 420.7
  Bottom Layer w6: C2.2 -375.31,363.31 -337.75,325.75 ; R3.1 -299.57,325.75 -337.75,325.75 ; R2.2 -234.69,330.68 -191.25,287.25 -191.25,260.25 -208.25,243.25 -255.25,243.25 -337.75,325.75
NetC4_2: C4.2 R3.2 R7.1 | length 135
  Bottom Layer w6: R3.2 C4.2 -319.69,444.75 R7.1
NetC7_2: C7.2 R7.2 R9.2 | length 232.8
  Bottom Layer w6: C7.2 -375.31,493.25 -362.81,505.75 -283,505.75 -257.25,480 ; R7.2 -257.25,480 ; R9.2 -257.25,480
NetC8_1: C8.1 R14.1 U3.6 U4.1 | length 1602.1
  Bottom Layer w6: C8.1 -584.69,-557.82 -569.25,-573.25 U4.1@-537.42,-573.25 ; R14.1 -545.31,-381.19 -569.25,-357.25 -585.25,-357.25 -637.82,-409.82 -705.23,-409.82 -717.8,-397.25 U3.6 -717.8,-309.66 -731.75,-295.7 -887.7,-295.7 -989.25,-397.25 -989.25,-681.75 -970.75,-700.25 -678.25,-700.25 -583.25,-605.25 -538.4,-605.25 U4.1@-537.42,-573.25 ; U4.1@-537.42,-573.25 U4.1 U4.1@-537.4,-573.25
NetC8_2: C8.2 C9.1 U3.7 U4.2 | length 1491.7
  Conexiones w6: v1(-357.25,-588.25) -309.25,-636.25 -169.25,-636.25 -152.25,-619.25 -152.25,-460.25 v1(-278.25,-334.25)
  Bottom Layer w6: U3.7 -692.2,-396.25 -690.63,-397.82 -649.74,-397.82 -568.17,-316.25 -510.25,-316.25 -474.68,-351.82 ; C8.2 -545.31,-475.69 ; U4.2 -500,-534.25 -545.31,-488.94 -545.31,-475.69 ; C9.1 -474.68,-351.82 ; v1(-357.25,-588.25) -456.25,-489.25 -531.75,-489.25 -545.31,-475.69 ; v1(-278.25,-334.25) -456.75,-334.25 -474.68,-351.82
NetC9_2: C9.2 R11.2 R12.1 | length 187.3
  Bottom Layer w6: C9.2 -435.31,-393.25 -397.31,-355.25 -341.31,-355.25 -340.31,-356.25 R12.1 R11.2
NetC11_2: C11.2 R12.2 R16.1 | length 259.5
  Bottom Layer w6: R16.1 -362.25,-505 -361.13,-487.25 -347.53,-473.66 -331.75,-473.66 -319.25,-461.16 -319.25,-419.75 -329.75,-409.25 -378.69,-409.25 -379.69,-408.25 ; C11.2 -379.69,-408.25 ; R12.2 -379.69,-408.25
NetC14_2: C14.2 R16.2 R18.2 | length 199.9
  Bottom Layer w6: C14.2 -435.31,-488.19 -397.25,-526.25 -341.31,-526.25 R16.2 R18.2
NetC15_1: C15.1 R23.1 U5.6 U6.1 | length 392.2
  Bottom Layer w6: C15.1 495.32,-373.25 ; U6.1 507.4,-308.17 495.32,-320.25 R23.1 495.32,-373.25 ; U5.6 657.8,-441.25 649.75,-433.2 649.75,-393.25 630.75,-374.25 496.32,-374.25 495.32,-373.25
NetC15_2: C15.2 C16.1 U5.7 U6.2 | length 493.6
  Bottom Layer w6: C16.1 399.05,-369.25 411.55,-381.75 457.5,-381.75 470,-369.25 ; U6.2 470,-369.25 ; U5.7 632.2,-428.96 618.25,-415 C15.2 534.69,-431.75 521.19,-445.25 483.5,-445.25 470,-431.75 470,-369.25
NetC16_2: C16.2 R20.2 R21.1 | length 259.9
  Bottom Layer w6: R20.2 R21.1 290.32,-302.12 305.75,-286.68 393.36,-286.68 438.42,-331.75 C16.2
NetC18_2: C18.2 R21.2 R35.1 | length 276.3
  Bottom Layer w6: R35.1 317.75,-455 317.75,-437.25 311.75,-431.25 270.25,-431.25 269.25,-430.25 269.25,-371.25 270.25,-370.25 304.69,-370.25 329.69,-345.25 ; C18.2 329.69,-345.25 ; R21.2 329.69,-345.25
NetC21_2: C21.2 R26.2 R35.2 | length 282.4
  Bottom Layer w6: R26.2 R35.2 290.32,-476.82 305.75,-492.25 418.25,-492.25 438.42,-472.08 C21.2
NetC22_1: C22.1 R31.1 U7.6 U8.1 | length 550
  Conexiones w6: v1(515.32,417.75) 560.75,463.18 v1(560.75,555.4)
  Bottom Layer w6: v1(515.32,417.75) v1@515.32,436.75 ; R31.1 v1@515.32,436.75 ; U8.1 537.4,579.03 ; C22.1 v1@554.68,561.47 ; v1(560.75,555.4) v1@554.68,561.47 ; U7.6 682.8,447.75 681.8,448.75 619.59,448.75 606.59,435.75 516.32,435.75 v1@515.32,436.75 ; 537.4,579.03 554.68,561.75 v1@554.68,561.47 ; 537.4,579.03 537.4,578.75 v1@554.68,561.47
NetC22_2: C22.2 C23.1 U7.7 U8.2 | length 1473.2
  Bottom Layer w6: C23.1 424.05,509.75 432.65,501.16 483.75,501.16 502.59,520 C22.2 515.31,562.75 500,578.06 U8.2 500,659.75 501,660.75 545.75,660.75 661.75,776.75 898.75,776.75 957.75,717.75 957.75,380.75 944.25,367.25 658.2,367.25 657.2,368.25 U7.7
NetC23_2: C23.2 R28.2 R29.1 | length 266.4
  Bottom Layer w6: R28.2 R29.1 315.32,568.25 328.82,581.75 449.92,581.75 463.42,568.25 C23.2
NetC25_2: C25.2 R29.2 R36.1 | length 253
  Bottom Layer w6: R36.1 354.69,461.75 354.69,476.75 ; C25.2 354.69,476.75 ; R29.2 354.69,531.75 353.69,530.75 306.25,530.75 293.75,518.25 293.75,476.75 294.75,475.75 353.69,475.75 354.69,476.75
NetC28_2: C28.2 R34.2 R36.2 | length 237.9
  Bottom Layer w6: R34.2 R36.2 317.75,430 317.75,419.75 327.25,410.25 446.75,410.25 463.42,426.92 C28.2
NetC29_1: U9.68
NetC35_2: C35.2 SIGX.31 U9.70 | length 1762.2
  Top Layer w6: C35.2 -370.31,-28.25 -371.31,-29.25 -441.25,-29.25 -525.25,54.75 -525.25,412.75 v1(-323.25,614.75) ; v1(-6.25,546.75) 9.84,530.65 U9.70 ; SIGX.31 15.16,625.34 v1(43.75,596.75)
  Bottom Layer w6: v1(-323.25,614.75) -185.25,614.75 -38.75,468.25 -5.75,468.25 6.75,480.75 6.75,533.75 v1(-6.25,546.75) v1(43.75,596.75)
NetC36_2: C36.2 SIGX.35 U9.69 | length 1761.9
  Top Layer w6: SIGX.35 -24.21,619.75 ; v1(-13.25,596.75) -24.21,607.71 -24.21,619.75 ; U9.69 29.53,324.72 22.75,331.5 22.75,572.79 -24.21,619.75 ; C36.2 518.25,-30 539.75,-8.5 539.75,319.75 417.75,441.75 v1(417.75,658.75)
  Bottom Layer w6: v1(-13.25,596.75) 48.75,658.75 v1(417.75,658.75)
NetR1_1: R1.1 R5.2 U1.1 | length 203.6
  Bottom Layer w6: R1.1 -585.31,280.75 -606.61,302.05 U1.1 -606.61,362.75 -594.36,375 R5.2
NetR1_2: R1.2 R4.1 U1.2 | length 311.4
  Bottom Layer w6: R4.1 -746.5,435 -694.25,382.75 -646.7,382.75 -632.2,368.25 U1.2 -632.2,295.27 -624.69,287.75 R1.2
NetR6_1: R6.1 R8.1 U1.3 | length 321.6
  Bottom Layer w6: R6.1 -799.57,369.75 -798.57,368.75 -658.8,368.75 -657.8,367.75 U1.3 -657.8,265.27 -660.31,262.75 R8.1
NetR10_1: R10.1 R14.2 U3.1 | length 822.1
  Top Layer w6: v1(-841.25,-388.25) -823.25,-370.25 v1(-514.25,-370.25)
  Bottom Layer w6: v1(-841.25,-388.25) -779.25,-450.25 -698.61,-450.25 -666.61,-482.25 U3.1 -666.61,-571.71 -645.31,-593.01 R10.1 ; R14.2 -584.69,-423.25 -583.69,-424.25 -515.25,-424.25 -514.25,-423.25 v1(-514.25,-370.25)
NetR10_2: R10.2 R13.1 U3.2 | length 314.9
  Bottom Layer w6: R13.1 -827.5,-425 -790.25,-462.25 -715.75,-462.25 -692.2,-485.8 U3.2 -692.2,-559.73 -684.69,-567.25 R10.2
NetR15_1: R15.1 R17.1 U3.3 | length 328.7
  Bottom Layer w6: R15.1 -756.25,-475 -749.07,-482.18 -726.25,-482.18 -717.8,-490.63 U3.3 -717.8,-594.73 -720.31,-597.25 R17.1
NetR19_1: R19.1 R23.2 U5.1 | length 212.8
  Bottom Layer w6: R23.2 593.25,-355 606.61,-341.63 U5.1 593.25,-308.31 580.32,-295.38 R19.1
NetR19_2: R19.2 R22.1 U5.2 | length 741.6
  Bottom Layer w6: U5.2 632.2,-273.25 619.69,-260.73 R19.2 619.69,-144.25 637.69,-126.25 893.25,-126.25 905.75,-138.75 905.75,-237.68 815.32,-328.12 R22.1
NetR24_1: R24.1 R25.1 U5.3 | length 366.2
  Bottom Layer w6: R25.1 655.32,-238.77 657.8,-241.25 U5.3 657.8,-344.25 738.54,-425 R24.1
NetR27_1: R27.1 R31.2 U7.1 | length 281.9
  Bottom Layer w6: R31.2 608.87,455 618.3,464.43 632.93,464.43 634.25,465.75 634.25,517.11 631.61,519.75 U7.1 616.75,586.56 616.75,645 R27.1
NetR27_2: R27.2 R30.1 U7.2 | length 330
  Bottom Layer w6: R27.2 644.69,614.27 657.2,601.75 U7.2 657.2,530.29 680.75,506.75 728.72,506.75 770.47,465 R30.1
NetR32_1: R32.1 R33.1 U7.3 | length 331.4
  Bottom Layer w6: R33.1 680.32,636.23 682.8,633.75 U7.3 682.8,532.25 695.04,520 R32.1
NetSIGX_9: SIGX.9 U9.75 | length 573.6
  Top Layer w6: U9.75 v1(-88.58,336.92) ; SIGX.9 231.69,609.8 v1(231.75,609.75)
  Bottom Layer w6: v1(-88.58,336.92) 152.25,577.75 152.25,593.75 168.25,609.75 v1(231.75,609.75)
NetSIGX_11: SIGX.11 U9.76 | length 1657.8
  Top Layer w6: v1(-293.25,695.75) -293.25,630.75 -200.25,537.75 -200.25,343.25 -215.75,327.75 -321.25,327.75 -356.75,292.25 -356.75,232.25 -344.25,219.75 -302.25,219.75 -269.25,252.75 -212.25,252.75 -211.25,251.75 -211.25,212.22 -207.78,208.75 -109.27,208.75 -108.27,209.75 U9.76 ; v3(211.75,716.75) 212.01,716.49 SIGX.11
  Conexiones w6: v1(-293.25,695.75) -293.25,766.75 -269.25,790.75 137.75,790.75 v3(211.75,716.75)
NetSIGX_13: SIGX.13 U9.77 | length 1051.4
  Top Layer w6: v1(-143.75,520.25) -187.25,476.75 -187.25,340.75 -157.25,310.75 -128.95,310.75 -127.95,309.75 U9.77 ; v1(192.32,578.75) SIGX.13
  Bottom Layer w6: v1(-143.75,520.25) -79.75,456.25 5.75,456.25 18.75,469.25 18.75,505.18 152.32,638.75 259.75,638.75 260.75,637.75 260.75,593.25 246.25,578.75 v1(192.32,578.75)
NetSIGX_15: SIGX.15 U9.64 | length 1435.3
  Top Layer w6: v3(124.75,472.75) 121.75,469.75 121.75,330 127.95,323.8 U9.64 ; SIGX.15 172.64,620.75 162.75,610.86 162.75,551.75 165.75,548.75 285.75,548.75 510.75,323.75 v3(510.75,187.75)
  Conexiones w6: v3(124.75,472.75) 155.75,441.75 291.25,441.75 352.25,380.75 352.25,346.25 v3(510.75,187.75)
NetSIGX_19: SIGX.19 U9.65 | length 935.3
  Top Layer w6: v3(105.75,743.75) 133.27,716.23 SIGX.19 ; U9.65 108.27,209.75 109.27,208.75 230.75,208.75 252.75,230.75 252.75,277.75 v3(207.75,322.75)
  Conexiones w6: v3(105.75,743.75) 105.75,567.75 72.75,534.75 72.75,420.75 121.75,371.75 121.75,343.25 142.25,322.75 v3(207.75,322.75)
NetSIGX_23: SIGX.23 U9.51 | length 1045.5
  Top Layer w6: SIGX.23 93.9,587.1 146,535 237,535 455.75,316.25 455.75,22.34 443.25,9.84 U9.51
NetSIGX_27: SIGX.27 U9.10 | length 1236.4
  Top Layer w6: U9.10 -209.25,10.84 -209.25,193.25 -239.25,223.25 v3(-240.25,223.25) ; v3(42.25,742.75) 54.53,730.47 SIGX.27
  Conexiones w6: v3(-240.25,223.25) -299.25,282.25 -299.25,411.84 -263.7,447.39 -263.7,743.25 -251.2,755.75 29.25,755.75 v3(42.25,742.75)
NetSIGX_41: SIGX.41 U2.4 U4.4 U6.4 U8.4 | length 3957.4
  Top Layer w6: v1(-571.52,78.22) -515.34,22.05 -515.34,-325.07 -470.95,-371.06 -462.25,-379.76 v1(-462.25,-711.25) ; SIGX.41 -83.27,610.25 v3(-72.75,599.73)
  Conexiones w6: v1(-571.52,78.22) -522.04,28.75 -249.25,28.75 -231.25,10.75 394.25,10.75 411.75,-6.75 v1(411.75,-113.4) ; v1(-441.75,170.75) -435.75,176.75 -98.75,176.75 -47.08,228.42 -47.08,418.08 -72.75,443.75 v3(-72.75,599.73)
  Bottom Layer w6: v1(-571.52,78.22) -500,149.75 -441.75,149.75 -426.1,149.75 -407.6,168.25 -407.6,168.75 ; U4.4 -462.6,-710.91 v1(-462.25,-711.25) ; v1(-441.75,170.75) -441.75,168.75 -407.6,168.75 ; U2.4 -407.6,168.75 ; v3(-72.75,599.73) -72.75,682.25 26.75,781.75 449.1,781.75 462.6,768.25 U8.4 ; v1(411.75,-113.4) 432.6,-134.25 U6.4
NetSIGX_47: SIGX.47 SIGX_In.15 | length 1577.7
  Top Layer w6: SIGX_In.15 -874.25,-169.25 -911.75,-169.25 -924.25,-156.75 -924.25,272.75 -451.25,745.75 -156.75,745.75 -142.32,731.32 SIGX.47
NetSIGX_51: SIGX.51 SIGY_In.1 | length 1738.3
  Top Layer w6: SIGX.51 -181.69,716.31 v1(-181.25,716.75)
  Conexiones w6: v1(321.75,823.75) 328.75,816.75 328.75,426.25 SIGY_In.1
  Bottom Layer w6: v1(-181.25,716.75) -103.25,794.75 292.75,794.75 v1(321.75,823.75)
NetU9_13: U9.13
NetU9_14: U9.14
NetU9_15: U9.15
NetU9_16: U9.16
NetU9_21: U9.21
NetU9_22: U9.22
NetU9_23: U9.23
NetU9_24: U9.24
NetU9_37: U9.37
NetU9_38: U9.38
NetU9_39: U9.39
NetU9_40: U9.40
NetU9_45: U9.45
NetU9_46: U9.46
NetU9_47: U9.47
NetU9_48: U9.48
XA_N: R4.2 SIGX_In.1 | length 242.6
  Bottom Layer w6: SIGX_In.1 -845,285.75 -863.25,304 -863.25,394.75 -838.94,419.06 R4.2
XA_P: R6.2 SIGX_In.3 | length 222.5
  Bottom Layer w6: SIGX_In.3 -845,266.75 -838.94,272.81 R6.2
XB_N: R13.2 SIGX_In.9 | length 566.4
  Top Layer w6: v1(-952.25,-425) -804.31,-277.06 -804.31,-30.69 SIGX_In.9
  Bottom Layer w6: v1(-952.25,-425) R13.2
XB_P: R15.2 SIGX_In.11 | length 630.2
  Top Layer w6: v1(-930.25,-506.75) -993.75,-443.25 -993.75,-330.75 -816.31,-153.31 -816.31,-68.69 SIGX_In.11
  Bottom Layer w6: v1(-930.25,-506.75) -930.25,-494.25 -911,-475 R15.2
YA_N: R22.2 SIGY_In.7 | length 465.6
  Top Layer w6: SIGY_In.7 809.31,14.31 809.31,-135.69 820.75,-147.12 820.75,-314.25 v1(854.69,-348.19)
  Bottom Layer w6: R22.2 v1(854.69,-348.19)
YA_P: R24.2 SIGY_In.5 | length 555.5
  Top Layer w6: SIGY_In.5 821.31,-23.69 821.31,-122.25 822.75,-123.69 845.75,-123.69 915.75,-193.69 v1(915.75,-425)
  Bottom Layer w6: R24.2 v1(915.75,-425)
YB_N: R30.2 SIGY_In.13 | length 336.5
  Conexiones w6: SIGY_In.13 820.75,234.25 820.75,347.75 v1(916.75,443.75)
  Bottom Layer w6: R30.2 895.5,465 v1(916.75,443.75)
YB_P: R32.2 SIGY_In.15 | length 324
  Top Layer w6: SIGY_In.15 881.75,286.75 v1(881.75,542.5)
  Bottom Layer w6: R32.2 879.69,540.44 v1(881.75,542.5)
pads on no net: C29.2 C30.2 C35.1 C36.1 SIGX.61 SIGX.62 SIGX.63 SIGX.64 SIGX.65 SIGX.66 SIGX_In.5 SIGX_In.7 SIGX_In.13 SIGY.61 SIGY.62 SIGY.63 SIGY.64 SIGY.65 SIGY.66 SIGY_In.3 SIGY_In.9 SIGY_In.11 U9.4 U9.5 U9.56 U9.57 U9.62 U9.63 U9.67 U9.78 U9.79 U9.81
copper on no net:
  other v2: -147.64,-147.64 -88.58,-147.64 -29.53,-147.64 29.53,-147.64 88.58,-147.64 147.64,-147.64 -147.64,-88.58 -88.58,-88.58 -29.53,-88.58 29.53,-88.58 88.58,-88.58 147.64,-88.58 -147.64,-29.53 -88.58,-29.53 -29.53,-29.53 29.53,-29.53 88.58,-29.53 147.64,-29.53 -147.64,29.53 -88.58,29.53 -29.53,29.53 29.53,29.53 88.58,29.53 147.64,29.53 -147.64,88.58 -88.58,88.58 -29.53,88.58 29.53,88.58 88.58,88.58 147.64,88.58 -147.64,147.64 -88.58,147.64 -29.53,147.64 29.53,147.64 88.58,147.64 147.64,147.64

## Polygon pours and split planes (outlines as drawn)
GND on Tierra (split plane): 999.9,-999.9 -999.9,-999.9 -999.9,999.9 999.9,999.9

## Text inside footprints (layer, text, board x,y; h text height)
P2: Bottom Overlay "1" at 867.99,855 h39.37; Bottom Overlay "9" at 549.09,855 h39.37
P3: Top Overlay "9" at -549.09,-950 h39.37; Top Overlay "1" at -867.99,-950 h39.37
SIGX: Mechanical 1 "J1" at 42.56,802.99 h30 r180
SIGX_In: Bottom Overlay "1" at -825,272.99 h39.37 r90; Bottom Overlay "15" at -825,-190 h39.37 r90
SIGY: Mechanical 1 "J1" at 7.44,-807.99 h30
SIGY_In: Bottom Overlay "1" at 830,-157.99 h39.37 r270; Bottom Overlay "15" at 830,305 h39.37 r270